# Altium PCB PCB.PcbDoc
Units mil, origin at the board's own origin, x right, y up, seen from the top; angles counter-clockwise.
Board outline 3050 x 1500 mil, 2 copper layers (Top Layer, Bottom Layer); 28 components, 21 nets, 78 pads, 0 vias.
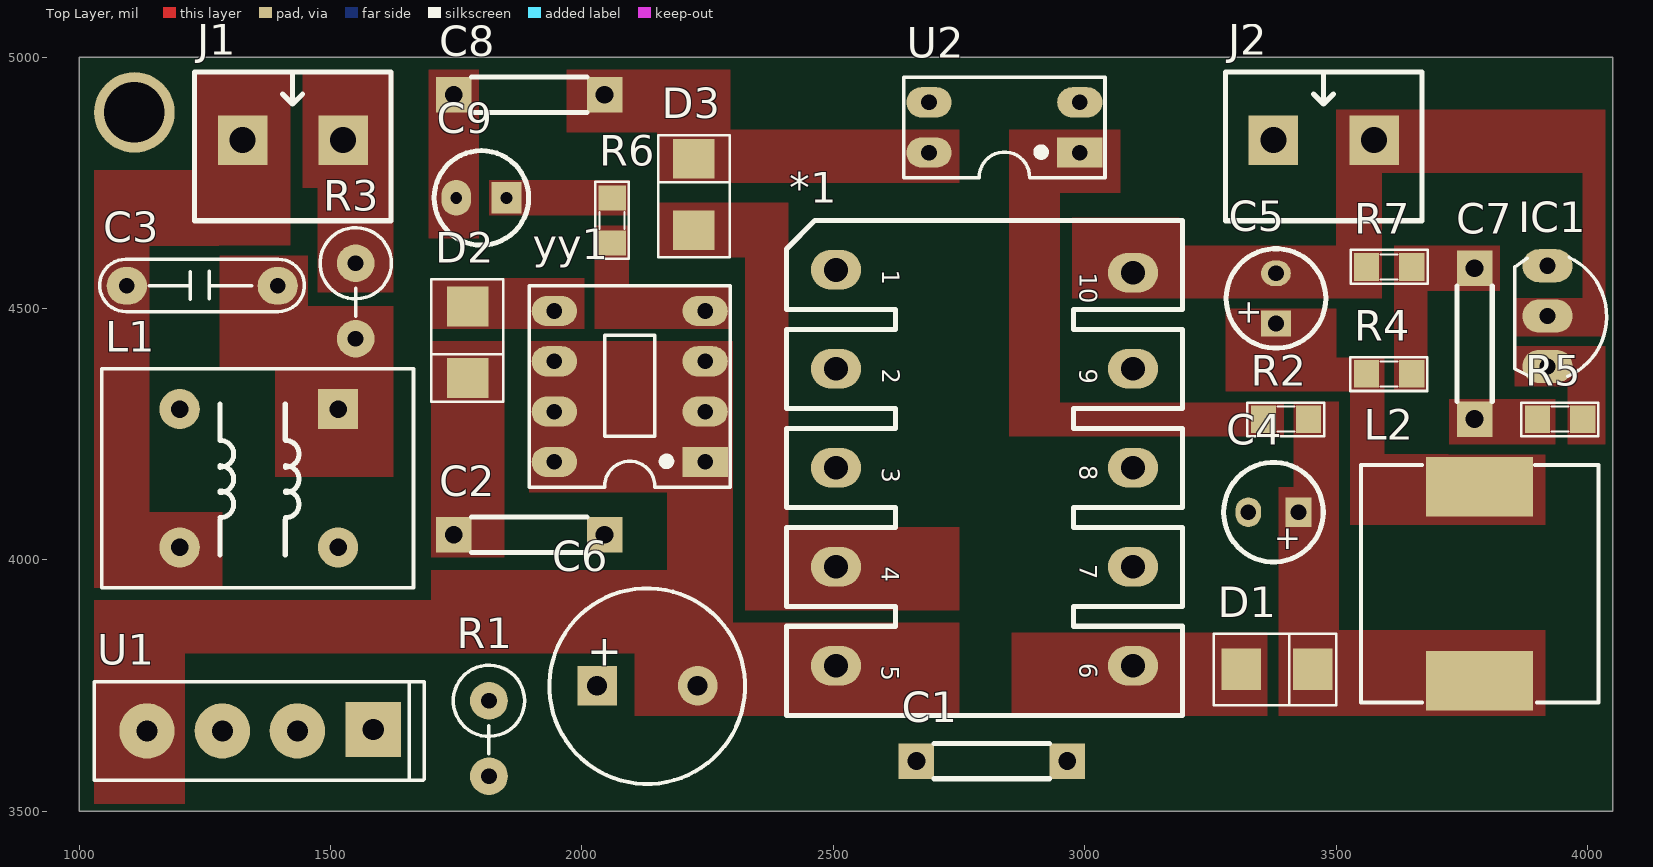
[diagram p0: Top Layer view]
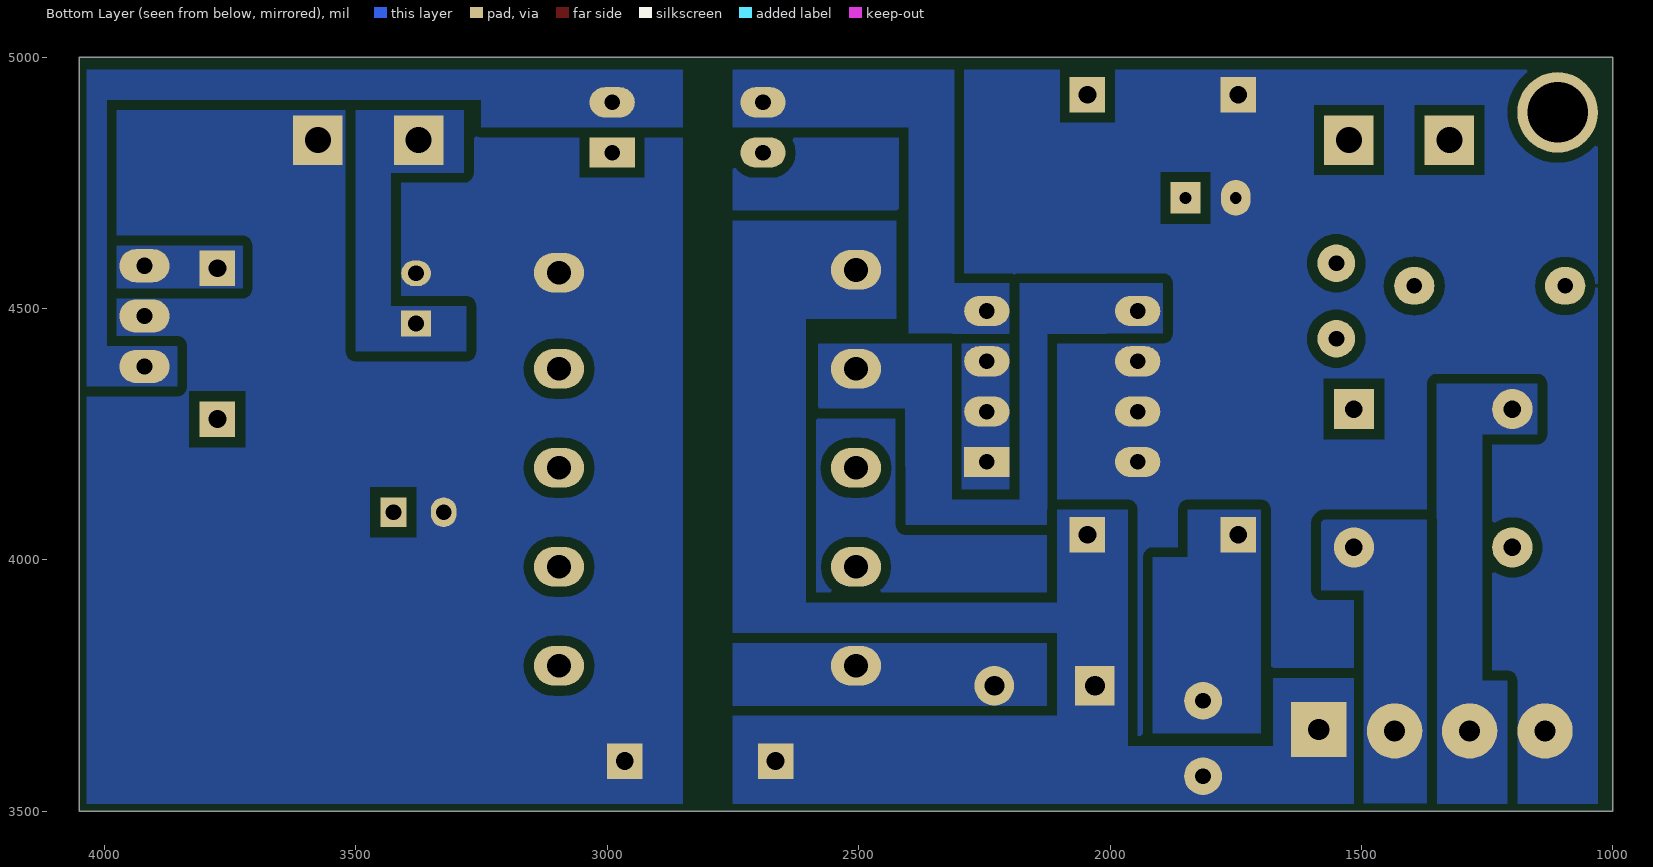
[diagram p1: Bottom Layer view, seen from below]
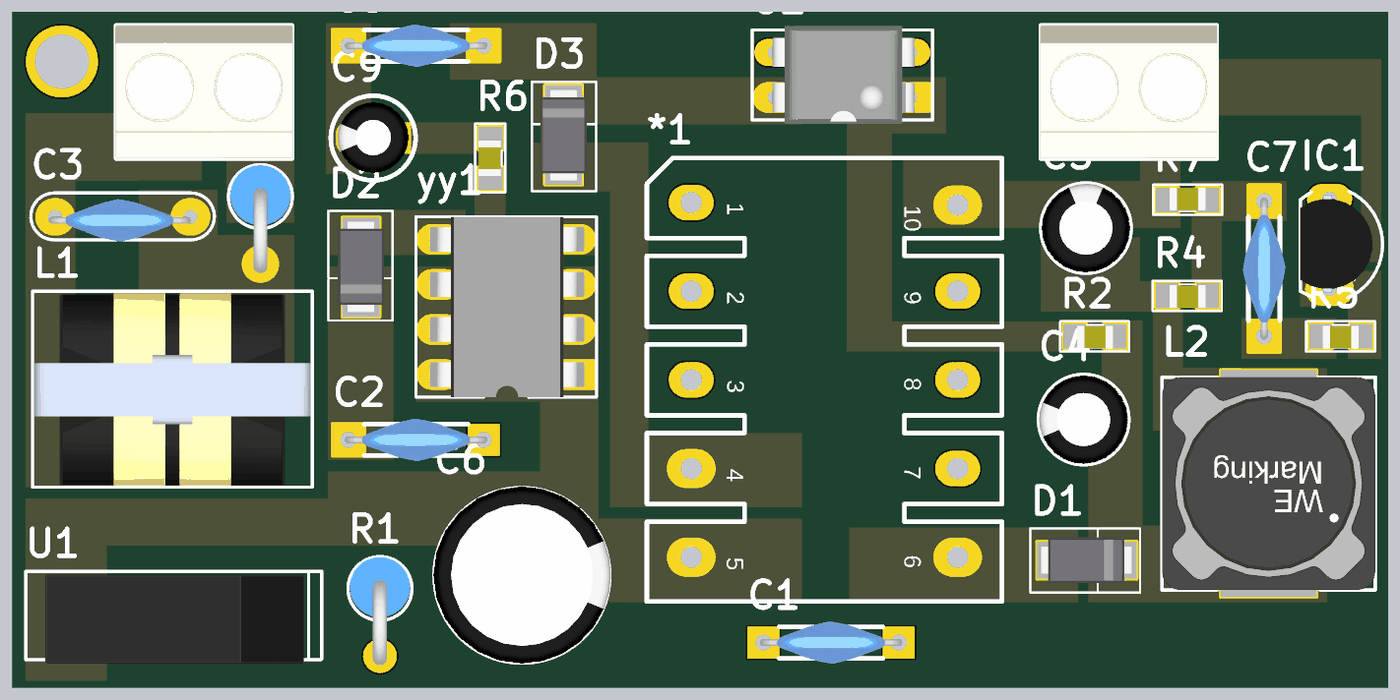
[diagram p2: 3D render of the assembled board from above, using the file's embedded part models]

## Layer stack, top to bottom
Top Solder: solder mask 0.4, Solder Resist, Dk 3.5
Top Layer: signal copper 1.4
Dielectric 1: dielectric 12.6, FR-4, Dk 4.8
Bottom Layer: signal copper 1.4
Bottom Solder: solder mask 0.4, Solder Resist, Dk 3.5

## Board outline
1000,3500 1000,5000 4050,5000 4050,3500

## Design rules (kind name [scope] priority, off if disabled: settings)
Clearance [All] p1: gap=20 ignorepadtopadclearanceinfootprint=TRUE except(0: Arc-Text Arc-Hole Track-Text Track-Hole SMDPad-Text SMDPad-Hole THPad-Text THPad-Hole Via-Text Via-Hole Fill-Text Fill-Hole Poly-Text Poly-Hole Region-Text Region-Hole Text-Text Text-Hole; 7: Arc-Arc Arc-Track Track-Track; 10: Arc-SMDPad Arc-THPad Arc-Via Track-SMDPad Track-THPad Track-Via SMDPad-SMDPad SMDPad-THPad SMDPad-Via THPad-THPad THPad-Via Via-Via)
PolygonConnect [All] p1: connectstyle=Direct reliefconductorwidth=10 reliefentries=4 polygonreliefangle="90 Angle" airgapwidth=10
RoutingVias [All] p1: holewidth=28 width=50 viastyle="Through Hole" minholewidth=28 minwidth=50 maxholewidth=28 maxwidth=50
SolderMaskExpansion [All] p1: expansion=4 istentingtop=FALSE
Width [All] p1: maxlimit=40 minlimit=20 preferedwidth=30
30 further rules are at their usual default settings.

## Components (designator, comment, footprint, x,y, rotation, side; value= is the part's Value field where it differs from the comment)
*1 "Transformer EE16" "Transformer SW" 2505,4576.85 r270 top
C1 "1nF/400V" 103/2KV 2965,3600 r180 top
C2 "1nF/400V" 103/2KV 1745,4050 r0 top
C3 "Capacitor Ceramic" CN3 1395,4545 r180 top value=220nF/275V
C4 "470uF/16V" C5mm 3375,4095 r180 top
C5 "470uF/16V" C5mm 3380,4520 r90 top
C6 "47uF/400V" C10mm 2130,3750 r0 top
C7 "100nF" 103/2KV 3775,4580 r270 top
C8 "100nF" 103/2KV 1745,4925 r0 top
C9 "47uF" C3MM 1800,4720 r180 top
D1 "1N5822" DO-214AC(SMA) 3360,3780 r180 top value="Diode c?m 1N5408"
D2 "1N5822" DO-214AC(SMA) 1770,4455 r90 top value="Diode c?m 1N5408"
D3 "1N5822" DO-214AC(SMA) 2225,4705 r270 top value="Diode c?m 1N5408"
IC1 "TL431" qto-92 3920,4485 r270 top
J1 "KF2" KF2-5.08 1425,4835 r0 top
J2 "KF2" KF2-5.08 3475,4835 r0 top
L1 "20mH" InductorFilter 1515,4300 r270 top value="Loc 220"
L2 "3.3uH" L-SMD-M-12x10 3785,3952.91 r180 top value="150 mH"
R1 "100K" RES-1WD 1815,3655 r270 top value=1K
R2 "100R" SM-0805 3400,4280 r0 top value=1K
R3 "10R" RES-1WD 1550,4525 r270 top value=1K
R4 "10k" SM-0805 3605,4370 r0 top value=1K
R5 "1k" SM-0805 3945,4280 r0 top value=1K
R6 "10R" SM-0805 2060,4675 r270 top value=1K
R7 "10k" SM-0805 3605,4582.5 r180 top value=1K
U1 "Diode Bridge Flate" "CAU 1A" 1585,3661 r180 top
U2 "PC817" DIP4/W0.3 2990,4810 r90 top
yy1 "TOP221" DIP8/W0.3 2245,4195 r90 top

## Footprints (in the part's own frame and the unit in brackets; to place one, negate y for a bottom-side part, rotate by r counter-clockwise, add the part's x,y. Pads: shape width x height; smd on the part's side, far side on the other; paste and mask are expansions set on the pad)
103/2KV [mm]
  rect 1.8x1.8 hole 0.9: 1(0,0) 2(7.62,0)
  silkscreen extent 0.89,-0.89 6.73,0.89, body extent -0.19,-1.2 7.81,1.19, height 9.03
C3MM [mm]
  rect 1.5x1.58 hole 0.6: 1(-1.27,0)
  oval 1.5x1.8 hole 0.6: 2(1.27,0)
  silkscreen extent -2.39,-2.39 2.39,2.39, body extent -2,-2.03 1.99,1.97, height 7.01
C5mm [mm]
  rect 1.3x1.5 hole 0.8: 1(-1.27,0)
  oval 1.3x1.5 hole 0.8: 2(1.27,0)
  silkscreen extent -2.51,-2.51 2.51,2.51, body extent -2.5,-2.5 2.49,2.5, height 11.01
C10mm [mm]
  rect 2x2 hole 1: 1(-2.54,0)
  round 2 hole 1: 2(2.54,0)
  silkscreen extent -4.95,-4.96 4.93,4.92, body extent -5,-5 4.97,5, height 20.01
"CAU 1A" [mil] "CAU 1A DET"
  rect 110x110 hole 42: 1(0,-2)
  round 110 hole 42: 2(151,1) 3(300,1) 4(450,1)
  silkscreen extent -101,-97 555,99, body extent -62,-90 512,107, height 453
CN3 [mil] "Cap np W 0.3"
  oval 80x75 hole 31: 1(0,0) 2(300,0)
  silkscreen extent -53,-53 354,51, body extent 0,-39 315,55, height 419
DIP4/W0.3 [mil] "4 PIN, W 300mil, Pin to pin 100mil"
  rect 60x90 hole 31: 1(0,0)
  oval 60x90 hole 31: 2(100,0) 3(100,300) 4(0,300)
  silkscreen extent -50,-50 150,350, body extent -59,-10 159,305, height 170
DIP8/W0.3 [mil] "8 PIN, W 300mil, Pin to pin 100mil"
  rect 60x90 hole 31: 1(0,0)
  oval 60x90 hole 31: 2(100,0) 3(200,0) 4(300,0) 5(300,300) 6(200,300) 7(100,300) 8(0,300)
  silkscreen extent -50,-50 350,350, body extent -50,-40 350,336, height 201
DO-214AC(SMA) [mm] "DO-214AC Diode Smallest Size"
  rect 2x2.1 smd: 1(1.245,-0.076) 2(-2.367,-0.076)
  silkscreen extent -3.56,-1.86 2.62,1.76, body extent -3.13,-1.38 2.07,1.22, height 2.4
InductorFilter [mil]
  rect 80x80 hole 35: 1(0,0)
  round 80 hole 35: 2(275,0) 3(0,-315) 4(275,-315)
  silkscreen extent -80,-470 355,150, body extent -75,-466 352,146, height 609
KF2-5.08 [mm]
  rect 2.5x2.5 hole 1.3: 1(-2.54,0) 2(2.54,0)
  silkscreen extent -4.95,-4.08 4.95,3.43, body extent -5,-4.07 5,3.43, height 10
L-SMD-M-12x10 [mm] "WE-PDA SMD Shielded Power Inductor, 1210"
  rect 5.4x3 smd: 1(0,4.9) 2(0,-4.9)
  silkscreen extent -6,-6 6,6, body extent -6,-6 6,6, height 9.7
qto-92 [mil] "TO-92"
  oval 66x100 hole 32: 1(-100,0) 2(0,0) 3(100,0)
  silkscreen extent -117,-65 120,118, body extent -109,-66 109,95, height 245
RES-1WD [mil]
  round 75 hole 31.5: 1(-65,0) 2(85,0)
  silkscreen extent -136,-71 40,71, body extent -135,-67 105,67, height 498
SM-0805 [mil] "Compoment SMD 80x50mil"
  rect 50x55 smd: 1(-45,0) 2(45,0)
  silkscreen extent -77,-34 76,33, body extent -40,-27 40,23, height 24
"Transformer SW" [mm] "Transformer; 4 Leads"
  oval 2x2.54 hole 1.2: 1(0,0) 2(5,0) 3(10,0) 4(15,0) 5(20,0) 6(20,15) 7(15,15) 8(10,15) 9(5,15) 10(0.142,15)
  silkscreen extent -2.5,-2.5 22.5,17.5, body extent -0.5,-0.5 0.5,0.5, height 1

## Part data
C1 C2 C7 C8: library part Cap2KV, "Capacitor Ceramic 2KV", LatestRevisionDate=17-Jul-2002, LatestRevisionNote="Re-released for DXP Platform.", PackageReference=RAD-0.3, Published=8-Jun-2000, Publisher="Altium Limited"
C3: library part CapCeramic, "Capacitor", LatestRevisionDate=17-Jul-2002, LatestRevisionNote="Re-released for DXP Platform.", PackageReference=RAD-0.3, Published=8-Jun-2000, Publisher="Altium Limited"
C4 C5 C6 C9: library part "Cap Pol", "Polarized Capacitor (Axial)", LatestRevisionDate=17-Jul-2002, LatestRevisionNote="Re-released for DXP Platform.", PackageReference=POLAR0.8, Published=8-Jun-2000, Publisher="Altium Limited"
D1 D2 D3: "Schottky Rectifiers"
IC1: "Programmable Shunt Regulator"
J1 J2: Manufacturer="Würth Elektronik eiSos GmbH", partNo=691103110002, ComponentLink1 Description=Manufacturer, ComponentLink1URL=http://www.we-online.com, ComponentLink2 Description=Datasheet, ComponentLink2URL=http://katalog.we-online.de/em/datasheet/6911031100xx.pdf, Created by="Karrer Zheng", Created Date="29 October 2013", NoPins=2
L1: library part "L fiter", "Inductor", Designed by=VanDungEvn
L2: library part Inductor, "Inductor"
R1 R2 R3 R4 R5 R6 R7: library part RM, "Resistor SMD"
U1: "Diode Bridge"
U2: "Single Opto"
yy1: library part TOP221-7PG, "Family Three-terminal Off-line PWM Switch"

## Free pads (board coordinates)
  round 160 hole 120: 3(1110,4890)

## Nets (pads, with @x,y where several pads share a name; then routed paths per layer and width w, separated by ;. In a path a pad name is that pad's centre, name@x,y a point inside that pad or via, vN(x,y) a via of type N, cw(c..) or ccw(c..) an arc to the next point about the centre after c; other vN are vias at no path point)
+5V: C5.1 J2.1 L2.2 R4.1
GND: *1.10 C1.1 C4.2 C5.2 IC1.2 J2.2 R7.2
Net*1_1: *1.1 C1.2 C2.2 C6.1 R1.2 U1.1
Net*1_2: *1.2 D2.1 yy1.5
Net*1_4: *1.4 D3.1
Net*1_6: *1.6 D1.1
NetC2_1: C2.1 D2.2 R1.1
NetC3_1: C3.1 L1.1 R3.2
NetC3_2: C3.2 J1.1 L1.4
NetC4_1: C4.1 D1.2 L2.1 R2.2
NetC7_1: C7.1 IC1.1 R4.2 R7.1
NetC7_2: C7.2 R5.1
NetC8_2: C8.2 D3.2 U2.4
NetC9_1: C9.1 R6.1
NetIC1_3: IC1.3 R5.2 U2.2
NetJ1_2: J1.2 R3.1
NetL1_2: L1.2 U1.2
NetL1_3: L1.3 U1.3
NetR2_1: R2.1 U2.1
NetR6_2: R6.2 U2.3 yy1.4
P_GND: *1.5 C6.2 C8.1 C9.2 U1.4 yy1.1 yy1.2 yy1.3 yy1.6 yy1.7 yy1.8
pads on no net: *1.3 *1.7 *1.8 *1.9

## Polygon pours and split planes (outlines as drawn)
NetR2_1 on Top Layer "NONET_L-01_P-001" (solid, pour order 104): 3323,4313 3323,4246 2850,4246 2850,4855 3070,4855 3070,4730 2950,4730 2950,4313 3395,4313 3395,4246 3323,4246
+5V on Top Layer "NONET_L-01_P-001" (solid, pour order 103): 3595,4402 3595,4335 3280,4335 3280,4500 3500,4500 3500,4402
GND on Top Layer "NONET_L-01_P-001" (solid, pour order 112): 3855,4445 3855,4520 3990,4520 3990,4770 3650,4770 3650,4895 4035,4895 4035,4445
Net*1_6 on Top Layer "NONET_L-01_P-001" (solid, pour order 123): 3363,3853.26 3363,3690 2855,3690 2855,3855 3361.26,3855
NetC4_1 on Top Layer "NONET_L-01_P-001" (solid, pour order 124): 3385,3860 3915,3860 3915,3690 3385,3690
+5V on Top Layer "NONET_L-01_P-001" (solid, pour order 122): 3528,4336 3528,4070 3915,4070 3915,4210 3595,4210 3595,4335
NetIC1_3 on Top Layer "NONET_L-01_P-001" (solid, pour order 121): 3960,4230 4035,4230 4035,4425 3855,4425 3855,4345 3960,4345
NetC7_2 on Top Layer "NONET_L-01_P-001" (solid, pour order 120): 3935,4230 3725,4230 3725,4320 3935,4320
NetC7_1 on Top Layer "NONET_L-01_P-001" (solid, pour order 119): 3615,4336 3681,4336 3681,4535 3825,4535 3825,4625 3615,4625
GND on Top Layer "NONET_L-01_P-001" (solid, pour order 110): 3590,4625 3590,4770 3650,4770 3650,4895 3500,4895 3500,4625
NetC4_1 on Top Layer "NONET_L-01_P-001" (solid, pour order 107): 3385,4145 3385,3710 3505,3710 3505,4145
NetC4_1 on Top Layer "NONET_L-01_P-001" (solid, pour order 106): 3505,4315 3505,4045 3385,4045 3385,4145 3415,4145 3415,4315
GND on Top Layer "NONET_L-01_P-001" (solid, pour order 101): 2975,4680.05 3191.48,4680.28 3191.48,4626.02 3192.5,4625 3590,4625 3590,4520 2975,4520
P_GND on Top Layer "NONET_L-01_P-001" (solid, pour order 99): 2300,3875 2750,3875 2750,3690 2105,3690 2105,3815 1210,3815 1210,3515 1030,3515 1030,3920 1700,3920 1700,3980 2170,3980 2170,4255 2300,4255
Net*1_2 on Top Layer "NONET_L-01_P-001" (solid, pour order 36): 1702.74,4460 2005,4460 2005,4560 1702.74,4560 1702.74,4462.74
NetC2_1 on Top Layer "NONET_L-01_P-001" (solid, pour order 97): 1700,4435 1845,4435 1845,4005 1700,4005
P_GND on Top Layer "NONET_L-01_P-001" (solid, pour order 95): 1895,4435 2300,4435 2300,4135 1895,4135
NetC8_2 on Top Layer "NONET_L-01_P-001" (solid, pour order 92): 2295,4855 2750,4855 2750,4750 2293.99,4750
Net*1_4 on Top Layer "NONET_L-01_P-001" (solid, pour order 91): 2151.74,4708 2153.74,4710 2410,4710 2410,4065 2750,4065 2750,3900 2325,3900 2325,4601.7 2151.74,4601.7
NetC3_2 on Top Layer "NONET_L-01_P-001" (solid, pour order 17): 1230,4970 1420,4970 1420,4699.5 1420,4625 1140,4625 1140,4095 1285,4095 1285,3945 1030,3945 1030,4775 1230,4775
NetJ1_2 on Top Layer "NONET_L-01_P-001" (solid, pour order 0): 1445,4970 1625,4970 1625,4532.5 1475,4532.5 1475,4740 1445,4740
NetC9_1 on Top Layer "NONET_L-01_P-001" (solid, pour order 30): 1810,4755 1810,4685 2095,4685 2095,4755
NetC8_2 on Top Layer "NONET_L-01_P-001" (solid, pour order 31): 2294,4751 2150,4751 2150,4849.86 1970,4850.14 1970,4975 2295,4975 2295,4752
P_GND on Top Layer "NONET_L-01_P-001" (solid, pour order 29): 1695,4975 1695,4640 1795,4640 1795,4975
NetR6_2 on Top Layer "NONET_L-01_P-001" (solid, pour order 24): 2025,4665 2025,4460 2295,4460 2295,4545 2093,4545 2093,4665
NetC3_1 on Top Layer "NONET_L-01_P-001" (solid, pour order 1): 1280,4605 1455,4605 1455,4505 1625,4505 1625,4165 1390,4165 1390,4380 1280,4380
P_GND on Bottom Layer "NONET_L-01_P-001" (solid, pour order 133): 1110,4975 2750,4975 2750,3515 1030,3515 1030,4890 1110,4890
GND on Bottom Layer "NONET_L-01_P-001" (solid, pour order 134): 2850,4975 4035,4975 4035,3515 2850,3515
NetIC1_3 on Bottom Layer "NONET_L-01_P-001" (solid, pour order 125): 2850,4860 3250,4860 3250,4915 3995,4915 3995,4425 3855,4425 3855,4345 4035,4345 4035,4975 2850,4975
GND on Bottom Layer "NONET_L-01_P-001" (solid, pour order 131): 2850,3660 2850,3515 3370,3515 3370,4040 3175,4040 3175,3660
GND on Bottom Layer "NONET_L-01_P-001" (solid, pour order 130): 2975,4625 2975,4520 3175,4520 3175,4040 3370,4040 3370,4145 3260,4145 3260,4625
+5V on Bottom Layer "NONET_L-01_P-001" (solid, pour order 129): 3285,4900 3500,4900 3500,4415 3280,4415 3280,4505 3430,4505 3430,4770 3285,4770
NetC7_1 on Bottom Layer "NONET_L-01_P-001" (solid, pour order 127): 3990,4625 3990,4540 3725,4540 3725,4625
NetR6_2 on Bottom Layer "NONET_L-01_P-001" (solid, pour order 93): 2180,4550 2310,4550 2310,4975 2750,4975 2750,4860 2400,4860 2400,4450 2180,4450
Net*1_1 on Bottom Layer "NONET_L-01_P-001" (solid, pour order 100): 2105,3690 2750,3690 2750,3515 2105,3515
Net*1_2 on Bottom Layer "NONET_L-01_P-001" (solid, pour order 89): 1895,4550 2180,4550 2180,4120 2315,4120 2315,4430 2580,4430 2580,4305 2583.74,4301.26 2406.97,4301.26 2406.19,4070 2125,4070 2125,4450 1895,4450
Net*1_1 on Bottom Layer "NONET_L-01_P-001" (solid, pour order 41): 1965,3810 1965,4100 2105,4100 2105,3810
Net*1_1 on Bottom Layer "NONET_L-01_P-001" (solid, pour order 87): 2090,3915 2605,3915 2605,4480 2425,4480 2425,4675 2750,4675 2750,3855 2090,3855
Net*1_1 on Bottom Layer "NONET_L-01_P-001" (solid, pour order 13): 1905,3630 1965,3630 1965,3810 2105,3810 2105,3515 1905,3515
P_GND on Bottom Layer "NONET_L-01_P-001" (solid, pour order 34): 1695,4800 1795,4800 1795,4430 2005,4430 2005,4330 1695,4330
Net*1_1 on Bottom Layer "NONET_L-01_P-001" (solid, pour order 44): 1905,3515 1510,3515 1510,3765 1675,3765 1675,3630 1905,3630
NetL1_3 on Bottom Layer "NONET_L-01_P-001" (solid, pour order 18): 1150,4350 1150,4250 1260,4250 1260,3760 1210,3760 1210,3515 1350,3515 1350,4350
NetC2_1 on Bottom Layer "NONET_L-01_P-001" (solid, pour order 14): 1915,3655 1915,4005 1845,4005 1845,4100 1700,4100 1700,3655 1730,3655
NetL1_2 on Bottom Layer "NONET_L-01_P-001" (solid, pour order 11): 1370,3515.87 1495,3515.87 1495,3940 1580,3940 1580,4075 1575,4080 1455,4080 1370,4080

## Text inside footprints (layer, text, board x,y; h text height)
*1: Top Overlay "1" at 2585,4576.85 h59.06 r270; Top Overlay "2" at 2585,4380 h60 r270; Top Overlay "3" at 2585,4183.15 h60 r270; Top Overlay "4" at 2583.74,3986.3 h60 r270; Top Overlay "5" at 2583.74,3789.45 h60 r270; Top Overlay "6" at 2977.44,3794.45 h60 r270; Top Overlay "7" at 2977.44,3991.3 h60 r270; Top Overlay "8" at 2977.44,4188.15 h60 r270; Top Overlay "9" at 2977.44,4380 h60 r270; Top Overlay "10" at 2977.44,4571.27 h60 r270
C4: Top Overlay "+" at 3430,4062 h47.24 r180
C5: Top Overlay "+" at 3347,4465 h47.24 r90
C6: Top Overlay "+" at 2010,3790 h60